# EAGLE board Sparkfun_MiP_ProMini-Pack-Panel-v10 (EAGLE 6.6.0), part 1 of 2
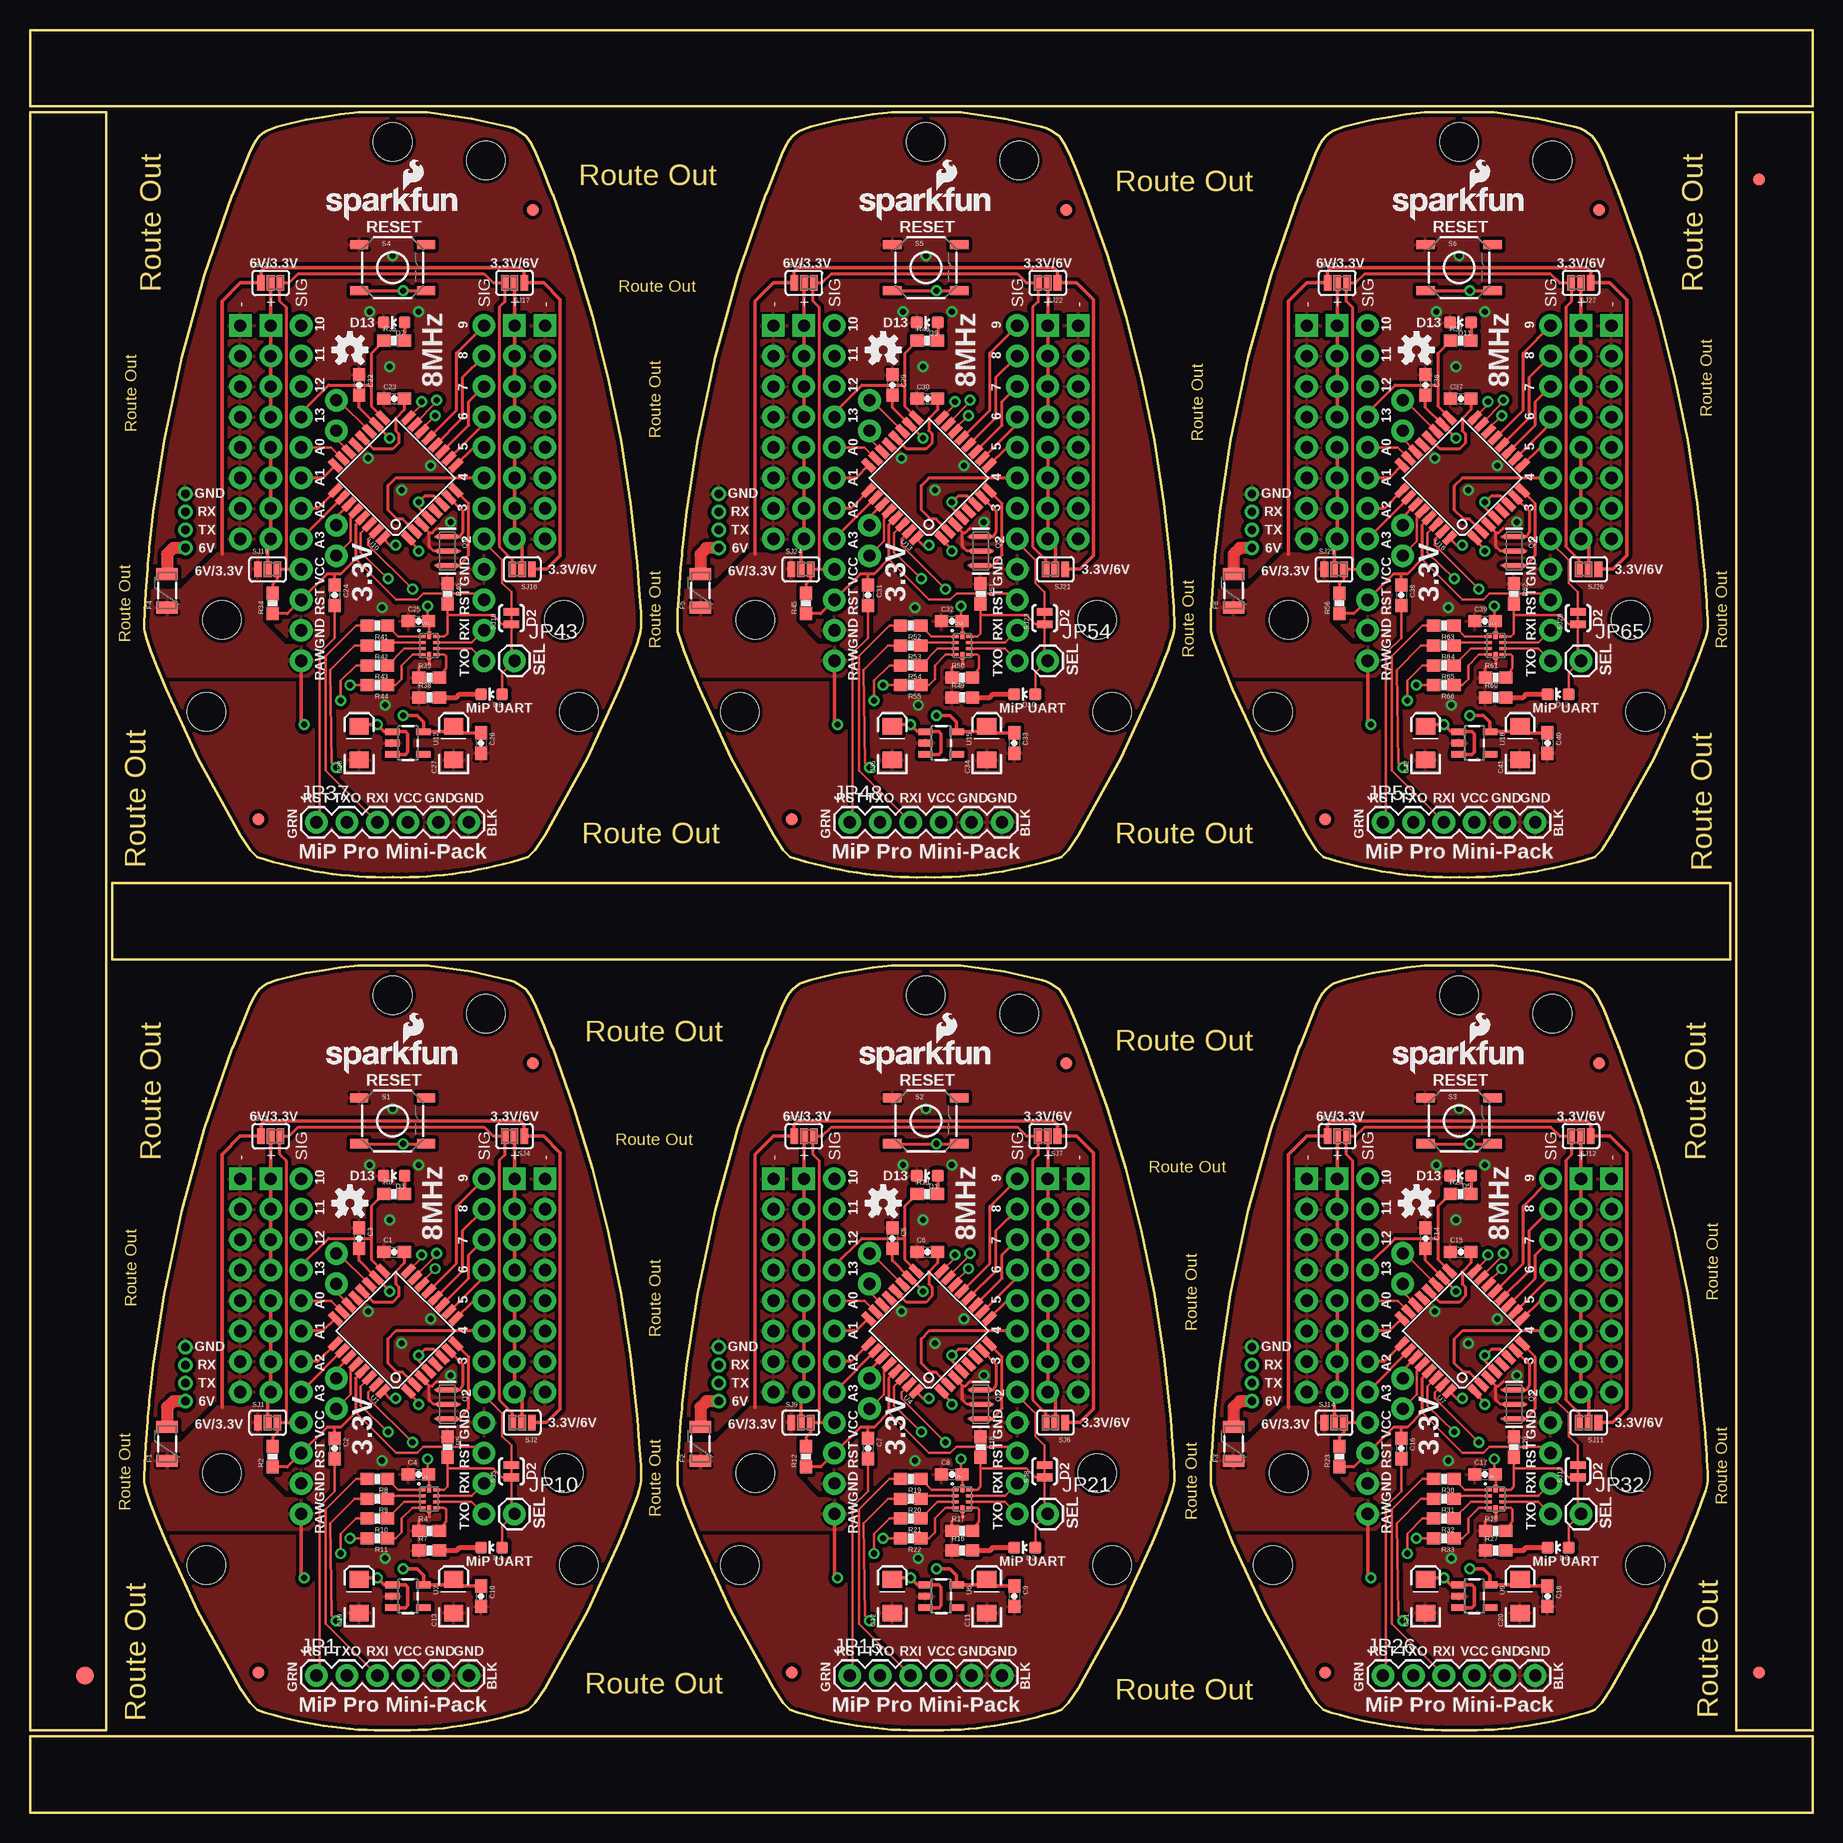
[diagram p0: board, top side]
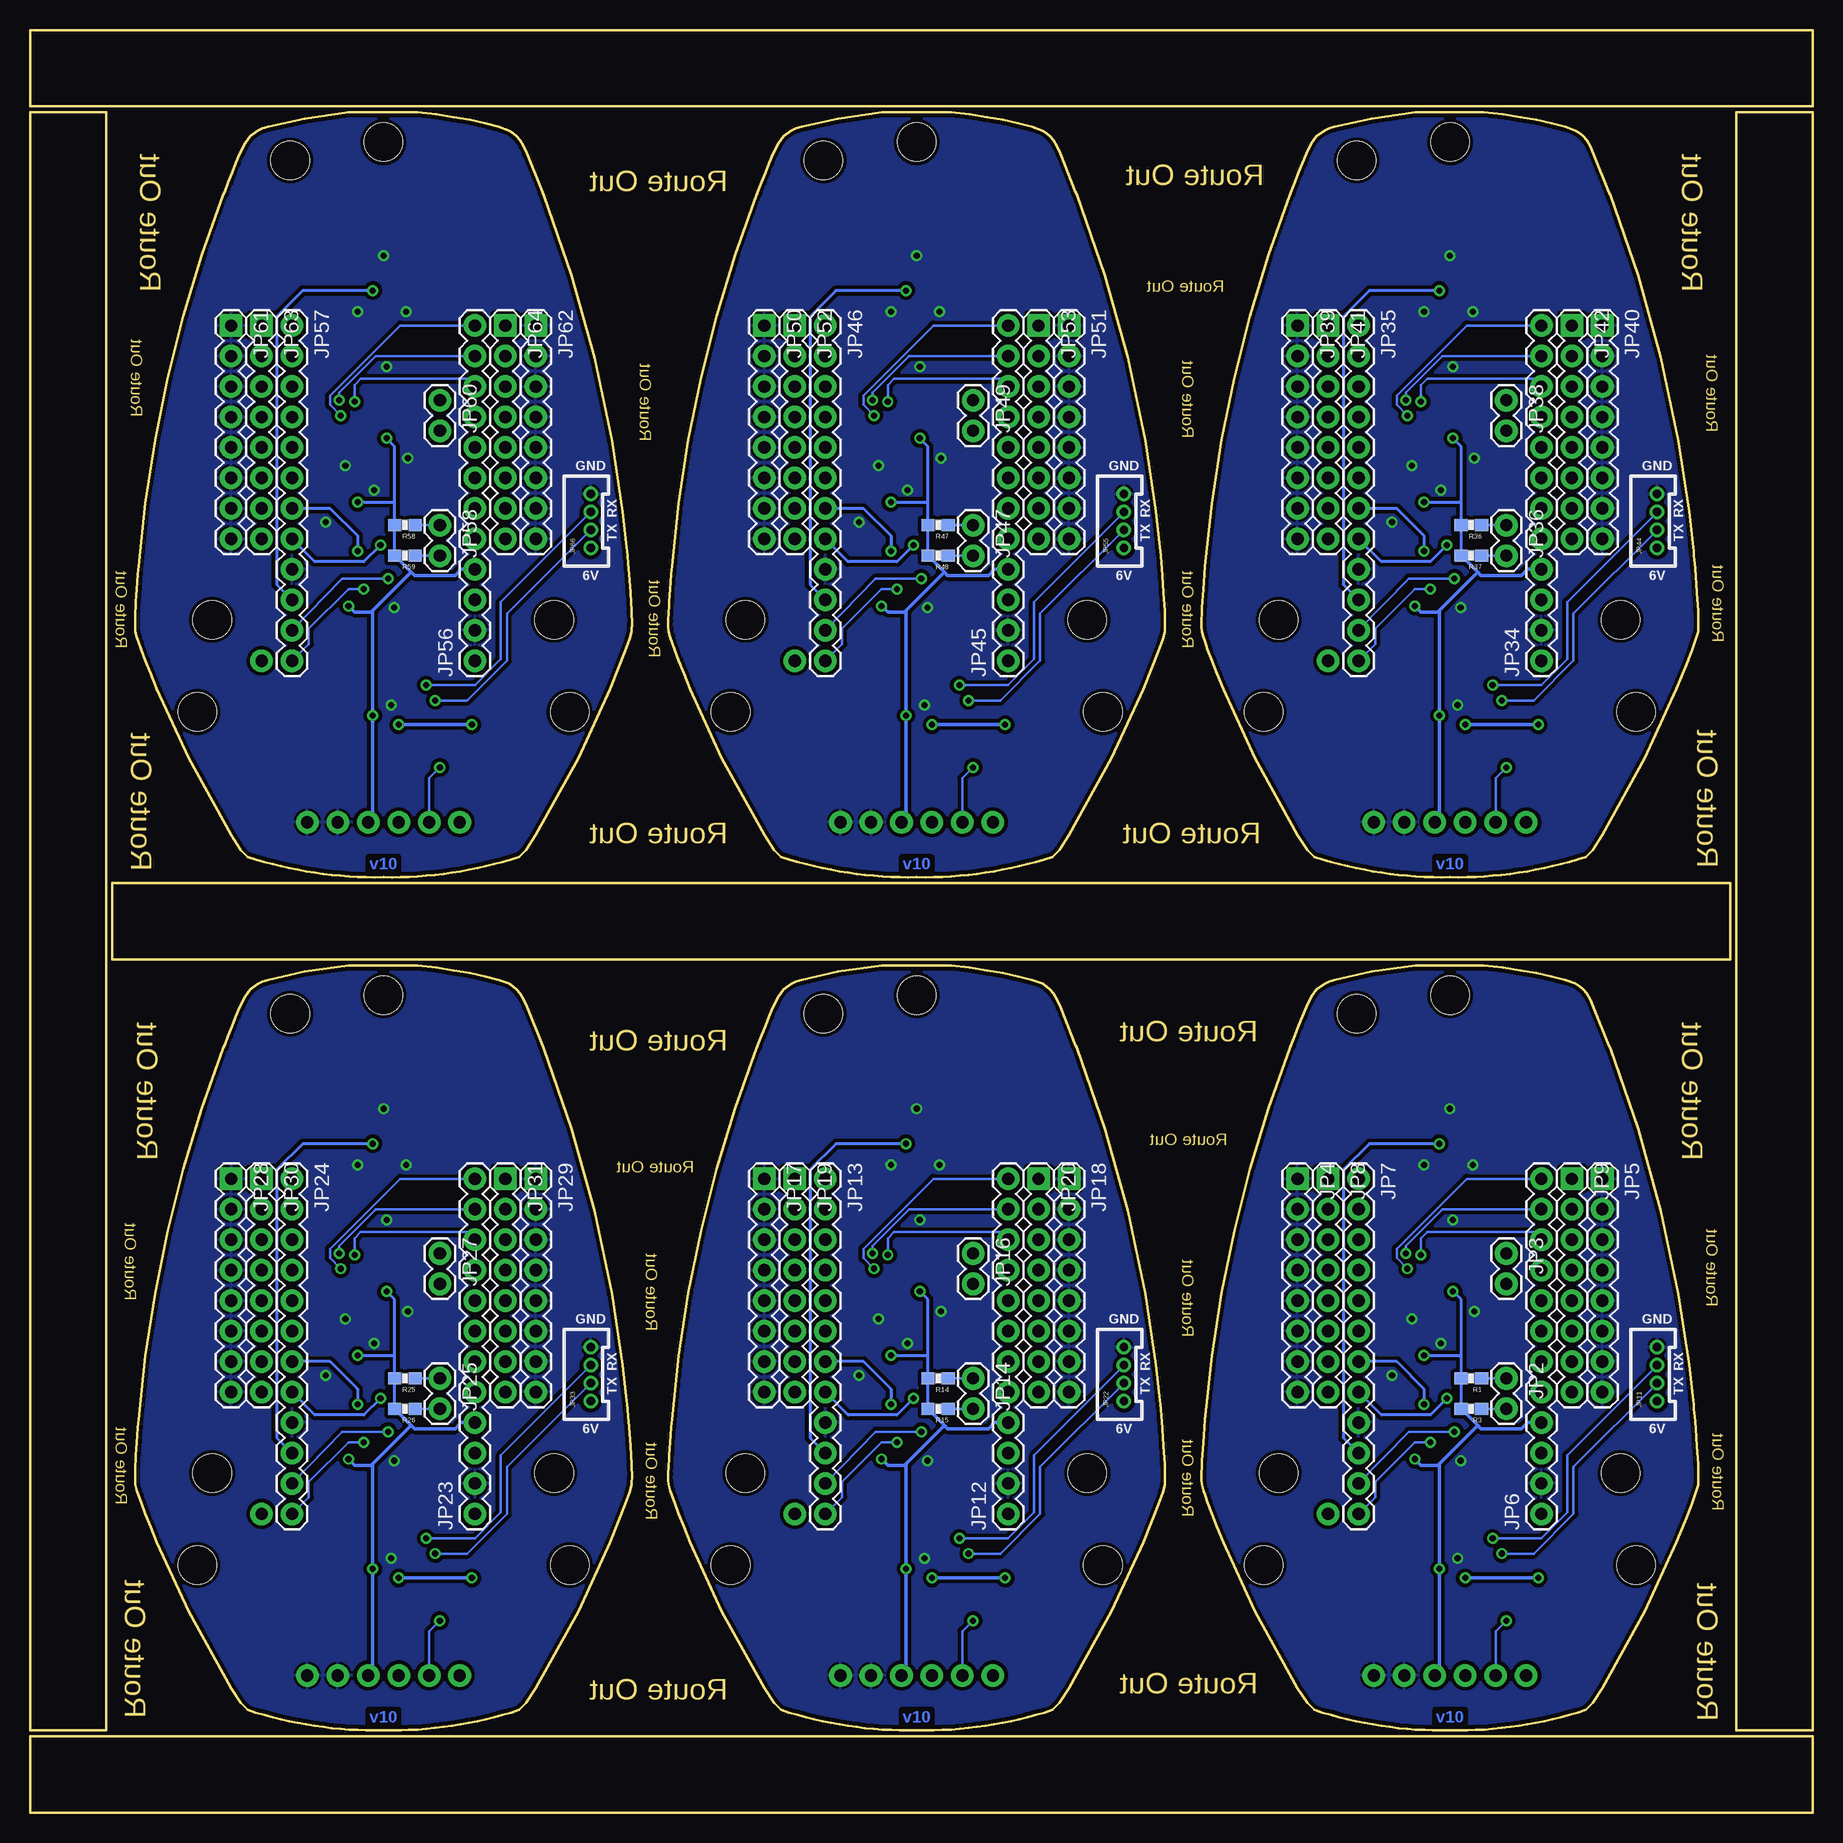
[diagram p1: board, bottom side, seen from below]

Size 148.59 x 148.59 mm. Coordinates in mm from the lower left corner, seen from the top.
Outline: 842 segments
Copper layers (1*16): Top 0.035mm / dielectric 1.5mm / Bottom 0.035mm
Design rules "default *": minimum track width 6mil, minimum drill 13mil, track to track 6mil, track to pad 6mil, pad to pad 6mil, via to via 6mil, smd to smd 6mil, copper to edge 8mil, drill to drill 8mil, minimum pad ring 10mil, minimum via ring 8mil, stop-mask expansion 4mil, vias tented up to drill 25mil, thermal gap 8mil
Net classes: 0 default: width 0.203 mm; 1 vcc: width 0.254 mm
Holes 3.2 mm at 30.23,68.12 38,66.6 44.5,28.3 14.71,20.62 45.75,20.62 16,28.3 74.68,68.12 82.45,66.6 88.95,28.3 59.16,20.62 90.2,20.62 60.45,28.3 119.13,68.12 126.9,66.6 133.4,28.3 103.61,20.62 134.65,20.62 104.9,28.3 30.23,139.24 38,137.72 44.5,99.42 14.71,91.74 45.75,91.74 16,99.42 74.68,139.24 82.45,137.72 88.95,99.42 59.16,91.74 90.2,91.74 60.45,99.42 119.13,139.24 126.9,137.72 133.4,99.42 103.61,91.74 134.65,91.74 104.9,99.42

## Footprints (pad centres in the part's own frame; a part is rotated, then mirrored left to right if it is on the bottom)
0603-CAP = smd 1.1 x 1: 1 -0.85,0; 2 0.85,0
EIA3216 = smd 1.4 x 1.6: A 1.4,0; C -1.4,0
LED-0603 = smd 1 x 1: A 0,-0.877; C 0,0.877
FIDUCIAL-1.5X3 = smd 1.5 x 1.5: 1 0,0
FIDUCIAL-1X2 = smd 1 x 1: 1 0,0
PTC-1206 = smd 1 x 1.8: 1 -1.4,0; 2 1.4,0
1X06 = drill 1.016 pad 1.88: 1 0,0; 2 2.54,0; 3 5.08,0; 4 7.62,0; 5 10.16,0; 6 12.7,0
1X02 = drill 1.016 pad 1.88: 1 0,0; 2 2.54,0
1X08 = drill 1.016 pad 1.88 square: 1 0,0 | drill 1.016 pad 1.88: 2 2.54,0; 3 5.08,0; 4 7.62,0; 5 10.16,0; 6 12.7,0; 7 15.24,0; 8 17.78,0
1X12 = drill 1.016 pad 1.88: 1 0,0; 2 2.54,0; 3 5.08,0; 4 7.62,0; 5 10.16,0; 6 12.7,0; 7 15.24,0; 8 17.78,0; 9 20.32,0; 10 22.86,0; 11 25.4,0; 12 27.94,0
1X01 = drill 1.016 pad 1.88: 1 0,0
1X04-1.5MM_JST = drill 0.7: 1 0,0; 2 1.5,0; 3 3,0; 4 4.5,0
RESONATOR-SMD = smd 0.45 x 1.905: 1 -1.2,0; 2 0,0; 3 1.2,0
0603-RES = smd 1.1 x 1: 1 -0.85,0; 2 0.85,0
TACTILE-SWITCH-SMD = smd 1.524 x 0.762: 1 -2.794,1.905; 2 2.794,1.905; 3 -2.794,-1.905; 4 2.794,-1.905
PAD-JUMPER-3-2OF3_NC_BY_PASTE_YES_SILK_FULL_BOX = smd 0.635 x 1.27: 1 -0.813,0; 2 0,0; 3 0.813,0
PAD-JUMPER-2-NC_BY_TRACE_YES_SILK = smd 0.635 x 1.27: 1 -0.508,0; 2 0.508,0
TQFP32-08 = smd 1.27 x 0.559: 1 -4.293,2.8; 2 -4.293,2; 3 -4.293,1.2; 4 -4.293,0.4; 5 -4.293,-0.4; 6 -4.293,-1.2; 7 -4.293,-2; 8 -4.293,-2.8; 17 4.293,-2.8; 18 4.293,-2; 19 4.293,-1.2; 20 4.293,-0.4; 21 4.293,0.4; 22 4.293,1.2; 23 4.293,2; 24 4.293,2.8 | smd 0.559 x 1.27: 9 -2.8,-4.293; 10 -2,-4.293; 11 -1.2,-4.293; 12 -0.4,-4.293; 13 0.4,-4.293; 14 1.2,-4.293; 15 2,-4.293; 16 2.8,-4.293; 25 2.8,4.293; 26 2,4.293; 27 1.2,4.293; 28 0.4,4.293; 29 -0.4,4.293; 30 -1.2,4.293; 31 -2,4.293; 32 -2.8,4.293
SOT23-5 = smd 0.55 x 1.2: 1 -0.95,-1.3; 2 0,-1.3; 3 0.95,-1.3; 4 0.95,1.3; 5 -0.95,1.3
QFN-10-RSE = smd 0.58 x 0.25: 1 -0.6,0.75; 2 -0.6,0.25; 3 -0.6,-0.25; 4 -0.6,-0.75; 6 0.6,-0.75; 7 0.6,-0.25; 8 0.6,0.25; 9 0.6,0.75 | smd 0.35 x 0.63: 5 0,-0.85; 10 0,0.85

## Placement (x,y rotation side)
C1  0.1uF  [0603-CAP]  30.35,46.74 0 top
C2  0.1uF  [0603-CAP]  25.4,30.35 270 top
C3  0.1uF  [0603-CAP]  27.43,47.88 270 top
C4  0.1uF  [0603-CAP]  32.38,28.19 0 top
C5  0.1uF  [0603-CAP]  71.88,47.88 270 top
C6  0.1uF  [0603-CAP]  74.8,46.74 0 top
C7  0.1uF  [0603-CAP]  69.85,30.35 270 top
C8  0.1uF  [0603-CAP]  76.83,28.19 0 top
C9  0.1uF  [0603-CAP]  82.04,18.03 270 top
C10  0.1uF  [0603-CAP]  37.59,18.03 270 top
C11  10uF  [EIA3216]  79.76,18.03 90 top
C12  10uF  [EIA3216]  71.88,18.03 90 top
C13  10uF  [EIA3216]  35.31,18.03 90 top
C14  0.1uF  [0603-CAP]  116.33,47.88 270 top
C15  0.1uF  [0603-CAP]  119.25,46.74 0 top
C16  0.1uF  [0603-CAP]  114.3,30.35 270 top
C17  0.1uF  [0603-CAP]  121.28,28.19 0 top
C18  0.1uF  [0603-CAP]  126.49,18.03 270 top
C19  10uF  [EIA3216]  27.43,18.03 90 top
C20  10uF  [EIA3216]  124.21,18.03 90 top
C21  10uF  [EIA3216]  116.33,18.03 90 top
C22  0.1uF  [0603-CAP]  27.43,119 270 top
C23  0.1uF  [0603-CAP]  30.35,117.86 0 top
C24  0.1uF  [0603-CAP]  25.4,101.47 270 top
C25  0.1uF  [0603-CAP]  32.38,99.31 0 top
C26  0.1uF  [0603-CAP]  37.59,89.15 270 top
C27  10uF  [EIA3216]  35.31,89.15 90 top
C28  10uF  [EIA3216]  27.43,89.15 90 top
C29  0.1uF  [0603-CAP]  71.88,119 270 top
C30  0.1uF  [0603-CAP]  74.8,117.86 0 top
C31  0.1uF  [0603-CAP]  69.85,101.47 270 top
C32  0.1uF  [0603-CAP]  76.83,99.31 0 top
C33  0.1uF  [0603-CAP]  82.04,89.15 270 top
C34  10uF  [EIA3216]  79.76,89.15 90 top
C35  10uF  [EIA3216]  71.88,89.15 90 top
C36  0.1uF  [0603-CAP]  116.33,119 270 top
C37  0.1uF  [0603-CAP]  119.25,117.86 0 top
C38  0.1uF  [0603-CAP]  114.3,101.47 270 top
C39  0.1uF  [0603-CAP]  121.28,99.31 0 top
C40  0.1uF  [0603-CAP]  126.49,89.15 270 top
C41  10uF  [EIA3216]  124.21,89.15 90 top
C42  10uF  [EIA3216]  116.33,89.15 90 top
D1  Green  [LED-0603]  74.8,53.09 90 top
D2  GREEN  [LED-0603]  82.93,22.1 90 top
D3  Green  [LED-0603]  30.35,53.09 90 top
D4  GREEN  [LED-0603]  38.48,22.1 90 top
D5  Green  [LED-0603]  119.25,53.09 90 top
D6  GREEN  [LED-0603]  127.38,22.1 90 top
D7  Green  [LED-0603]  30.35,124.21 90 top
D8  GREEN  [LED-0603]  38.48,93.22 90 top
D9  Green  [LED-0603]  74.8,124.21 90 top
D10  GREEN  [LED-0603]  82.93,93.22 90 top
D11  Green  [LED-0603]  119.25,124.21 90 top
D12  GREEN  [LED-0603]  127.38,93.22 90 top
E$1  [FIDUCIAL-1.5X3]  4.57,11.43 0 top
E$4  [FIDUCIAL-1X2]  144.15,11.68 0 top
E$10  [FIDUCIAL-1X2]  144.15,136.14 180 top
F1  PTCSMD  [PTC-1206]  11.43,30.73 90 top
F2  PTCSMD  [PTC-1206]  55.88,30.73 90 top
F3  PTCSMD  [PTC-1206]  100.33,30.73 90 top
F4  PTCSMD  [PTC-1206]  11.43,101.85 90 top
F5  PTCSMD  [PTC-1206]  55.88,101.85 90 top
F6  PTCSMD  [PTC-1206]  100.33,101.85 90 top
FID1  FIDUCIAL1X2  [FIDUCIAL-1X2]  19.05,11.68 0 top
FID2  FIDUCIAL1X2  [FIDUCIAL-1X2]  41.91,62.48 0 top
FID3  FIDUCIAL1X2  [FIDUCIAL-1X2]  63.5,11.68 0 top
FID4  FIDUCIAL1X2  [FIDUCIAL-1X2]  86.36,62.48 0 top
FID5  FIDUCIAL1X2  [FIDUCIAL-1X2]  107.95,11.68 0 top
FID6  FIDUCIAL1X2  [FIDUCIAL-1X2]  130.81,62.48 0 top
FID7  FIDUCIAL1X2  [FIDUCIAL-1X2]  19.05,82.8 0 top
FID8  FIDUCIAL1X2  [FIDUCIAL-1X2]  41.91,133.6 0 top
FID9  FIDUCIAL1X2  [FIDUCIAL-1X2]  63.5,82.8 0 top
FID10  FIDUCIAL1X2  [FIDUCIAL-1X2]  86.36,133.6 0 top
FID11  FIDUCIAL1X2  [FIDUCIAL-1X2]  107.95,82.8 0 top
FID12  FIDUCIAL1X2  [FIDUCIAL-1X2]  130.81,133.6 0 top
JP1  FTDI Basic  [1X06]  23.88,11.43 0 top
JP2  [1X02]  25.53,36.2 270 bottom
JP3  [1X02]  25.53,46.61 270 bottom
JP4  [1X08]  42.93,52.83 270 bottom
JP5  [1X08]  17.53,52.83 270 bottom
JP6  [1X12]  22.61,24.89 90 bottom
JP7  [1X12]  37.85,52.83 270 bottom
JP8  [1X08]  40.39,52.83 270 bottom
JP9  [1X08]  20.07,52.83 270 bottom
JP10  M01PTH  [1X01]  40.39,24.89 0 top
JP11  [1X04-1.5MM_JST]  12.95,34.29 90 bottom
JP12  [1X12]  67.06,24.89 90 bottom
JP13  [1X12]  82.3,52.83 270 bottom
JP14  [1X02]  69.98,36.2 270 bottom
JP15  FTDI Basic  [1X06]  68.33,11.43 0 top
JP16  [1X02]  69.98,46.61 270 bottom
JP17  [1X08]  87.38,52.83 270 bottom
JP18  [1X08]  61.98,52.83 270 bottom
JP19  [1X08]  84.84,52.83 270 bottom
JP20  [1X08]  64.52,52.83 270 bottom
JP21  M01PTH  [1X01]  84.84,24.89 0 top
JP22  [1X04-1.5MM_JST]  57.4,34.29 90 bottom
JP23  [1X12]  111.51,24.89 90 bottom
JP24  [1X12]  126.75,52.83 270 bottom
JP25  [1X02]  114.43,36.2 270 bottom
JP26  FTDI Basic  [1X06]  112.78,11.43 0 top
JP27  [1X02]  114.43,46.61 270 bottom
JP28  [1X08]  131.83,52.83 270 bottom
JP29  [1X08]  106.43,52.83 270 bottom
JP30  [1X08]  129.29,52.83 270 bottom
JP31  [1X08]  108.97,52.83 270 bottom
JP32  M01PTH  [1X01]  129.29,24.89 0 top
JP33  [1X04-1.5MM_JST]  101.85,34.29 90 bottom
JP34  [1X12]  22.61,96.01 90 bottom
JP35  [1X12]  37.85,123.95 270 bottom
JP36  [1X02]  25.53,107.31 270 bottom
JP37  FTDI Basic  [1X06]  23.88,82.55 0 top
JP38  [1X02]  25.53,117.73 270 bottom
JP39  [1X08]  42.93,123.95 270 bottom
JP40  [1X08]  17.53,123.95 270 bottom
JP41  [1X08]  40.39,123.95 270 bottom
JP42  [1X08]  20.07,123.95 270 bottom
JP43  M01PTH  [1X01]  40.39,96.01 0 top
JP44  [1X04-1.5MM_JST]  12.95,105.41 90 bottom
JP45  [1X12]  67.06,96.01 90 bottom
JP46  [1X12]  82.3,123.95 270 bottom
JP47  [1X02]  69.98,107.31 270 bottom
JP48  FTDI Basic  [1X06]  68.33,82.55 0 top
JP49  [1X02]  69.98,117.73 270 bottom
JP50  [1X08]  87.38,123.95 270 bottom
JP51  [1X08]  61.98,123.95 270 bottom
JP52  [1X08]  84.84,123.95 270 bottom
JP53  [1X08]  64.52,123.95 270 bottom
JP54  M01PTH  [1X01]  84.84,96.01 0 top
JP55  [1X04-1.5MM_JST]  57.4,105.41 90 bottom
JP56  [1X12]  111.51,96.01 90 bottom
JP57  [1X12]  126.75,123.95 270 bottom
JP58  [1X02]  114.43,107.31 270 bottom
JP59  FTDI Basic  [1X06]  112.78,82.55 0 top
JP60  [1X02]  114.43,117.73 270 bottom
JP61  [1X08]  131.83,123.95 270 bottom
JP62  [1X08]  106.43,123.95 270 bottom
JP63  [1X08]  129.29,123.95 270 bottom
JP64  [1X08]  108.97,123.95 270 bottom
JP65  M01PTH  [1X01]  129.29,96.01 0 top
JP66  [1X04-1.5MM_JST]  101.85,105.41 90 bottom
LOGO1  SFE_LOGO_NAME_FLAME.1_INCH  [SFE_LOGO_NAME_FLAME_.1]  24.26,61.47 0 top
LOGO2  OSHW-LOGOS  [OSHW-LOGO-S]  26.67,50.8 0 top
LOGO3  SFE_LOGO_NAME_FLAME.1_INCH  [SFE_LOGO_NAME_FLAME_.1]  68.71,61.47 0 top
LOGO4  OSHW-LOGOS  [OSHW-LOGO-S]  71.12,50.8 0 top
LOGO5  SFE_LOGO_NAME_FLAME.1_INCH  [SFE_LOGO_NAME_FLAME_.1]  113.16,61.47 0 top
LOGO6  OSHW-LOGOS  [OSHW-LOGO-S]  115.57,50.8 0 top
LOGO7  SFE_LOGO_NAME_FLAME.1_INCH  [SFE_LOGO_NAME_FLAME_.1]  24.26,132.59 0 top
LOGO8  OSHW-LOGOS  [OSHW-LOGO-S]  26.67,121.92 0 top
LOGO9  SFE_LOGO_NAME_FLAME.1_INCH  [SFE_LOGO_NAME_FLAME_.1]  68.71,132.59 0 top
LOGO10  OSHW-LOGOS  [OSHW-LOGO-S]  71.12,121.92 0 top
LOGO11  SFE_LOGO_NAME_FLAME.1_INCH  [SFE_LOGO_NAME_FLAME_.1]  113.16,132.59 0 top
LOGO12  OSHW-LOGOS  [OSHW-LOGO-S]  115.57,121.92 0 top
Q1  8MHz  [RESONATOR-SMD]  34.8,34.04 270 top
Q2  8MHz  [RESONATOR-SMD]  79.25,34.04 270 top
Q3  8MHz  [RESONATOR-SMD]  123.7,34.04 270 top
Q4  8MHz  [RESONATOR-SMD]  34.8,105.16 270 top
Q5  8MHz  [RESONATOR-SMD]  79.25,105.16 270 top
Q6  8MHz  [RESONATOR-SMD]  123.7,105.16 270 top
R1  DNP  [0603-RES]  28.45,36.2 180 bottom
R2  10K  [0603-RES]  20.24,29.67 90 top
R3  DNP  [0603-RES]  28.45,33.66 180 bottom
R4  10K  [0603-RES]  33.27,23.5 0 top
R5  10K  [0603-RES]  34.8,30.48 270 top
R6  330  [0603-RES]  30.35,51.56 0 top
R7  1K  [0603-RES]  33.27,21.84 0 top
R8  1K  [0603-RES]  28.96,27.81 180 top
R9  1K  [0603-RES]  28.96,26.16 180 top
R10  1K  [0603-RES]  28.96,24.51 180 top
R11  1K  [0603-RES]  28.96,22.86 180 top
R12  10K  [0603-RES]  64.69,29.67 90 top
R13  330  [0603-RES]  74.8,51.56 0 top
R14  DNP  [0603-RES]  72.9,36.2 180 bottom
R15  DNP  [0603-RES]  72.9,33.66 180 bottom
R16  1K  [0603-RES]  77.72,21.84 0 top
R17  10K  [0603-RES]  77.72,23.5 0 top
R18  10K  [0603-RES]  79.25,30.48 270 top
R19  1K  [0603-RES]  73.41,27.81 180 top
R20  1K  [0603-RES]  73.41,26.16 180 top
R21  1K  [0603-RES]  73.41,24.51 180 top
R22  1K  [0603-RES]  73.41,22.86 180 top
R23  10K  [0603-RES]  109.14,29.67 90 top
R24  330  [0603-RES]  119.25,51.56 0 top
R25  DNP  [0603-RES]  117.35,36.2 180 bottom
R26  DNP  [0603-RES]  117.35,33.66 180 bottom
R27  1K  [0603-RES]  122.17,21.84 0 top
R28  10K  [0603-RES]  122.17,23.5 0 top
R29  10K  [0603-RES]  123.7,30.48 270 top
R30  1K  [0603-RES]  117.86,27.81 180 top
R31  1K  [0603-RES]  117.86,26.16 180 top
R32  1K  [0603-RES]  117.86,24.51 180 top
R33  1K  [0603-RES]  117.86,22.86 180 top
R34  10K  [0603-RES]  20.24,100.79 90 top
R35  330  [0603-RES]  30.35,122.68 0 top
R36  DNP  [0603-RES]  28.45,107.31 180 bottom
R37  DNP  [0603-RES]  28.45,104.78 180 bottom
R38  1K  [0603-RES]  33.27,92.96 0 top
R39  10K  [0603-RES]  33.27,94.61 0 top
R40  10K  [0603-RES]  34.8,101.6 270 top
R41  1K  [0603-RES]  28.96,98.93 180 top
R42  1K  [0603-RES]  28.96,97.28 180 top
R43  1K  [0603-RES]  28.96,95.63 180 top
R44  1K  [0603-RES]  28.96,93.98 180 top
R45  10K  [0603-RES]  64.69,100.79 90 top
R46  330  [0603-RES]  74.8,122.68 0 top
R47  DNP  [0603-RES]  72.9,107.31 180 bottom
R48  DNP  [0603-RES]  72.9,104.78 180 bottom
R49  1K  [0603-RES]  77.72,92.96 0 top
R50  10K  [0603-RES]  77.72,94.61 0 top
R51  10K  [0603-RES]  79.25,101.6 270 top
R52  1K  [0603-RES]  73.41,98.93 180 top
R53  1K  [0603-RES]  73.41,97.28 180 top
R54  1K  [0603-RES]  73.41,95.63 180 top
R55  1K  [0603-RES]  73.41,93.98 180 top
R56  10K  [0603-RES]  109.14,100.79 90 top
R57  330  [0603-RES]  119.25,122.68 0 top
R58  DNP  [0603-RES]  117.35,107.31 180 bottom
R59  DNP  [0603-RES]  117.35,104.78 180 bottom
R60  1K  [0603-RES]  122.17,92.96 0 top
R61  10K  [0603-RES]  122.17,94.61 0 top
R62  10K  [0603-RES]  123.7,101.6 270 top
R63  1K  [0603-RES]  117.86,98.93 180 top
R64  1K  [0603-RES]  117.86,97.28 180 top
R65  1K  [0603-RES]  117.86,95.63 180 top
R66  1K  [0603-RES]  117.86,93.98 180 top
S1  Reset  [TACTILE-SWITCH-SMD]  30.23,57.66 0 top
S2  Reset  [TACTILE-SWITCH-SMD]  74.68,57.66 0 top
S3  Reset  [TACTILE-SWITCH-SMD]  119.13,57.66 0 top
S4  Reset  [TACTILE-SWITCH-SMD]  30.23,128.78 0 top
S5  Reset  [TACTILE-SWITCH-SMD]  74.68,128.78 0 top
S6  Reset  [TACTILE-SWITCH-SMD]  119.13,128.78 0 top
SJ1  [PAD-JUMPER-3-2OF3_NC_BY_PASTE_YES_SILK_FULL_BOX]  19.81,32.51 0 top
SJ2  [PAD-JUMPER-3-2OF3_NC_BY_PASTE_YES_SILK_FULL_BOX]  41.02,32.51 180 top
SJ3  [PAD-JUMPER-3-2OF3_NC_BY_PASTE_YES_SILK_FULL_BOX]  20.07,56.39 0 top
SJ4  [PAD-JUMPER-3-2OF3_NC_BY_PASTE_YES_SILK_FULL_BOX]  40.39,56.39 180 top
SJ5  D2 Jumper  [PAD-JUMPER-2-NC_BY_TRACE_YES_SILK]  40.13,28.45 90 top
SJ6  [PAD-JUMPER-3-2OF3_NC_BY_PASTE_YES_SILK_FULL_BOX]  85.47,32.51 180 top
SJ7  [PAD-JUMPER-3-2OF3_NC_BY_PASTE_YES_SILK_FULL_BOX]  84.84,56.39 180 top
SJ8  D2 Jumper  [PAD-JUMPER-2-NC_BY_TRACE_YES_SILK]  84.58,28.45 90 top
SJ9  [PAD-JUMPER-3-2OF3_NC_BY_PASTE_YES_SILK_FULL_BOX]  64.26,32.51 0 top
SJ10  [PAD-JUMPER-3-2OF3_NC_BY_PASTE_YES_SILK_FULL_BOX]  64.52,56.39 0 top
SJ11  [PAD-JUMPER-3-2OF3_NC_BY_PASTE_YES_SILK_FULL_BOX]  129.92,32.51 180 top
SJ12  [PAD-JUMPER-3-2OF3_NC_BY_PASTE_YES_SILK_FULL_BOX]  129.29,56.39 180 top
SJ13  D2 Jumper  [PAD-JUMPER-2-NC_BY_TRACE_YES_SILK]  129.03,28.45 90 top
SJ14  [PAD-JUMPER-3-2OF3_NC_BY_PASTE_YES_SILK_FULL_BOX]  108.71,32.51 0 top
SJ15  [PAD-JUMPER-3-2OF3_NC_BY_PASTE_YES_SILK_FULL_BOX]  108.97,56.39 0 top
SJ16  [PAD-JUMPER-3-2OF3_NC_BY_PASTE_YES_SILK_FULL_BOX]  41.02,103.63 180 top
SJ17  [PAD-JUMPER-3-2OF3_NC_BY_PASTE_YES_SILK_FULL_BOX]  40.39,127.51 180 top
SJ18  D2 Jumper  [PAD-JUMPER-2-NC_BY_TRACE_YES_SILK]  40.13,99.57 90 top
SJ19  [PAD-JUMPER-3-2OF3_NC_BY_PASTE_YES_SILK_FULL_BOX]  19.81,103.63 0 top
SJ20  [PAD-JUMPER-3-2OF3_NC_BY_PASTE_YES_SILK_FULL_BOX]  20.07,127.51 0 top
SJ21  [PAD-JUMPER-3-2OF3_NC_BY_PASTE_YES_SILK_FULL_BOX]  85.47,103.63 180 top
SJ22  [PAD-JUMPER-3-2OF3_NC_BY_PASTE_YES_SILK_FULL_BOX]  84.84,127.51 180 top
SJ23  D2 Jumper  [PAD-JUMPER-2-NC_BY_TRACE_YES_SILK]  84.58,99.57 90 top
SJ24  [PAD-JUMPER-3-2OF3_NC_BY_PASTE_YES_SILK_FULL_BOX]  64.26,103.63 0 top
SJ25  [PAD-JUMPER-3-2OF3_NC_BY_PASTE_YES_SILK_FULL_BOX]  64.52,127.51 0 top
SJ26  [PAD-JUMPER-3-2OF3_NC_BY_PASTE_YES_SILK_FULL_BOX]  129.92,103.63 180 top
SJ27  [PAD-JUMPER-3-2OF3_NC_BY_PASTE_YES_SILK_FULL_BOX]  129.29,127.51 180 top
SJ28  D2 Jumper  [PAD-JUMPER-2-NC_BY_TRACE_YES_SILK]  129.03,99.57 90 top
SJ29  [PAD-JUMPER-3-2OF3_NC_BY_PASTE_YES_SILK_FULL_BOX]  108.71,103.63 0 top
SJ30  [PAD-JUMPER-3-2OF3_NC_BY_PASTE_YES_SILK_FULL_BOX]  108.97,127.51 0 top
U1  ATMEGA328  [TQFP32-08]  30.48,40.13 135 top
U2  MIC5205  [SOT23-5]  31.5,18.03 270 top
U3  TS3USB221A  [QFN-10-RSE]  33.27,26.16 0 top
U4  ATMEGA328  [TQFP32-08]  74.93,40.13 135 top
U5  TS3USB221A  [QFN-10-RSE]  77.72,26.16 0 top
U6  MIC5205  [SOT23-5]  75.95,18.03 270 top
U7  ATMEGA328  [TQFP32-08]  119.38,40.13 135 top
U8  TS3USB221A  [QFN-10-RSE]  122.17,26.16 0 top
U9  MIC5205  [SOT23-5]  120.4,18.03 270 top
U10  ATMEGA328  [TQFP32-08]  30.48,111.25 135 top
U11  TS3USB221A  [QFN-10-RSE]  33.27,97.28 0 top
U12  MIC5205  [SOT23-5]  31.5,89.15 270 top
U13  ATMEGA328  [TQFP32-08]  74.93,111.25 135 top
U14  TS3USB221A  [QFN-10-RSE]  77.72,97.28 0 top
U15  MIC5205  [SOT23-5]  75.95,89.15 270 top
U16  ATMEGA328  [TQFP32-08]  119.38,111.25 135 top
U17  TS3USB221A  [QFN-10-RSE]  122.17,97.28 0 top
U18  MIC5205  [SOT23-5]  120.4,89.15 270 top

## Library data of the parts
C1-C10 C14-C18 C22-C26 C29-C33 C36-C40 = SparkFun-Capacitors; PROD_ID: CAP-00810
C11-C13 C19-C21 C27 C28 C34 C35 C41 C42 JP1-JP3 JP6 JP7 JP12-JP16 JP23-JP27 JP34-JP38 JP45-JP49 JP56-JP60 R1-R3 R12 R14 R15 R23 R25 R26 R34 R36 R37 R45 R47 R48 R56 R58 R59 = SparkFun
D1-D12 = SparkFun-LED; PROD_ID: DIO-00821
E$1 = SparkFun-Retired
E$4 E$10 FID1-FID12 LOGO1-LOGO12 = SparkFun-Aesthetics
F1-F6 = SparkFun-PowerIC; PROD_ID: RES-11150
JP4 JP5 JP8-JP11 JP17-JP22 JP28-JP33 JP39-JP44 JP50-JP55 JP61-JP66 = SparkFun-Connectors
Q1-Q6 = SparkFun-FreqCtrl; PROD_ID: XTAL-08895
R4 R5 R17 R18 R28 R29 R39 R40 R50 R51 R61 R62 = SparkFun-Resistors; PROD_ID: RES-00824
R6 R13 R24 R35 R46 R57 = SparkFun-Resistors; PROD_ID: RES-00818
R7-R11 R16 R19-R22 R27 R30-R33 R38 R41-R44 R49 R52-R55 R60 R63-R66 = SparkFun-Resistors; PROD_ID: RES-07856
S1-S6 = SparkFun-Electromechanical; PROD_ID: SWCH-08247
SJ1-SJ30 = SparkFun-Passives
U1 U4 U7 U10 U13 U16 = SparkFun-DigitalIC; PROD_ID: IC-09069
U2 U6 U9 U12 U15 U18 = SparkFun-PowerIC; PROD_ID: VREG-00822
U3 U5 U8 U11 U14 U17 = SparkFun-AnalogIC; PROD_ID: IC-12115

## Nets
A0: JP6.8 U1.23
A1: JP6.7 U1.24
A2: JP6.6 U1.25
A3: JP6.5 U1.26
A4: JP2.1 R1.1 U1.27
A5: JP2.2 R3.1 U1.28
A6: JP3.1 U1.19
A7: JP3.2 U1.22
A8: JP14.2 R15.1 U4.28
A9: JP14.1 R14.1 U4.27
A10: JP12.5 U4.26
A11: JP12.6 U4.25
A12: JP12.7 U4.24
A13: JP12.8 U4.23
A14: JP16.1 U4.19
A15: JP16.2 U4.22
A16: JP25.2 R26.1 U7.28
A17: JP25.1 R25.1 U7.27
A18: JP23.5 U7.26
A19: JP23.6 U7.25
A20: JP23.7 U7.24
A21: JP23.8 U7.23
A22: JP27.1 U7.19
A23: JP27.2 U7.22
A24: JP36.2 R37.1 U10.28
A25: JP36.1 R36.1 U10.27
A26: JP34.5 U10.26
A27: JP34.6 U10.25
A28: JP34.7 U10.24
A29: JP34.8 U10.23
A30: JP38.1 U10.19
A31: JP38.2 U10.22
A32: JP47.2 R48.1 U13.28
A33: JP47.1 R47.1 U13.27
A34: JP45.5 U13.26
A35: JP45.6 U13.25
A36: JP45.7 U13.24
A37: JP45.8 U13.23
A38: JP49.1 U13.19
A39: JP49.2 U13.22
A40: JP58.2 R59.1 U16.28
A41: JP58.1 R58.1 U16.27
A42: JP56.5 U16.26
A43: JP56.6 U16.25
A44: JP56.7 U16.24
A45: JP56.8 U16.23
A46: JP60.1 U16.19
A47: JP60.2 U16.22
AREF: C1.2 U1.20
AREF1: C6.2 U4.20
AREF2: C15.2 U7.20
AREF3: C23.2 U10.20
AREF4: C30.2 U13.20
AREF5: C37.2 U16.20
D1: JP13.1 U4.13
D2: JP7.8 SJ5.2 U1.32
D3: JP7.7 U1.1
D4: JP7.6 U1.2
D5: JP7.5 U1.9
D6: JP7.4 U1.10
D7: JP7.3 U1.11
D8: JP7.2 U1.12
D9: JP7.1 U1.13
D10: JP6.12 U1.14
D11: JP13.2 U4.12
D12: JP13.8 SJ8.2 U4.32
D13: JP13.7 U4.1
D14: JP13.6 U4.2
D15: JP13.5 U4.9
D16: JP13.4 U4.10
D17: JP13.3 U4.11
D18: JP12.12 U4.14
D19: JP24.1 U7.13
D20: JP24.2 U7.12
D21: JP24.8 SJ13.2 U7.32
D22: JP24.7 U7.1
D23: JP24.6 U7.2
D24: JP24.5 U7.9
D25: JP24.4 U7.10
D26: JP24.3 U7.11
D27: JP23.12 U7.14
D28: JP35.1 U10.13
D29: JP35.2 U10.12
D30: JP35.8 SJ18.2 U10.32
D31: JP35.7 U10.1
D32: JP35.6 U10.2
D33: JP35.5 U10.9
D34: JP35.4 U10.10
D35: JP35.3 U10.11
D36: JP34.12 U10.14
D37: JP46.1 U13.13
D38: JP46.2 U13.12
D39: JP46.8 SJ23.2 U13.32
D40: JP46.7 U13.1
D41: JP46.6 U13.2
D42: JP46.5 U13.9
D43: JP46.4 U13.10
D44: JP46.3 U13.11
D45: JP45.12 U13.14
D46: JP57.1 U16.13
D47: JP57.2 U16.12
D48: JP57.8 SJ28.2 U16.32
D49: JP57.7 U16.1
D50: JP57.6 U16.2
D51: JP57.5 U16.9
D52: JP57.4 U16.10
D53: JP57.3 U16.11
D54: JP56.12 U16.14
DTR: C2.2 JP1.1
DTR1: C7.2 JP15.1
DTR2: C16.2 JP26.1
DTR3: C24.2 JP37.1
DTR4: C31.2 JP48.1
DTR5: C38.2 JP59.1
GND: C1.1 C3.1 C4.1 C10.2 C13.C C19.C D3.C JP1.5 JP1.6 JP4.1 JP4.2 JP4.3 JP4.4 JP4.5 JP4.6 JP4.7 JP4.8 JP5.1 JP5.2 JP5.3 JP5.4 JP5.5 JP5.6 JP5.7 JP5.8 JP6.2 JP7.9 JP11.4 Q1.2 R4.1 R5.1 R7.1 S1.1 U1.3 U1.5 U1.21 U2.2 U3.5
GND1: C5.1 C6.1 C8.1 C9.2 C11.C C12.C D1.C JP12.2 JP13.9 JP15.5 JP15.6 JP17.1 JP17.2 JP17.3 JP17.4 JP17.5 JP17.6 JP17.7 JP17.8 JP18.1 JP18.2 JP18.3 JP18.4 JP18.5 JP18.6 JP18.7 JP18.8 JP22.4 Q2.2 R16.1 R17.1 R18.1 S2.1 U4.3 U4.5 U4.21 U5.5 U6.2
GND2: C14.1 C15.1 C17.1 C18.2 C20.C C21.C D5.C JP23.2 JP24.9 JP26.5 JP26.6 JP28.1 JP28.2 JP28.3 JP28.4 JP28.5 JP28.6 JP28.7 JP28.8 JP29.1 JP29.2 JP29.3 JP29.4 JP29.5 JP29.6 JP29.7 JP29.8 JP33.4 Q3.2 R27.1 R28.1 R29.1 S3.1 U7.3 U7.5 U7.21 U8.5 U9.2
GND3: C22.1 C23.1 C25.1 C26.2 C27.C C28.C D7.C JP34.2 JP35.9 JP37.5 JP37.6 JP39.1 JP39.2 JP39.3 JP39.4 JP39.5 JP39.6 JP39.7 JP39.8 JP40.1 JP40.2 JP40.3 JP40.4 JP40.5 JP40.6 JP40.7 JP40.8 JP44.4 Q4.2 R38.1 R39.1 R40.1 S4.1 U10.3 U10.5 U10.21 U11.5 U12.2
GND4: C29.1 C30.1 C32.1 C33.2 C34.C C35.C D9.C JP45.2 JP46.9 JP48.5 JP48.6 JP50.1 JP50.2 JP50.3 JP50.4 JP50.5 JP50.6 JP50.7 JP50.8 JP51.1 JP51.2 JP51.3 JP51.4 JP51.5 JP51.6 JP51.7 JP51.8 JP55.4 Q5.2 R49.1 R50.1 R51.1 S5.1 U13.3 U13.5 U13.21 U14.5 U15.2
GND5: C36.1 C37.1 C39.1 C40.2 C41.C C42.C D11.C JP56.2 JP57.9 JP59.5 JP59.6 JP61.1 JP61.2 JP61.3 JP61.4 JP61.5 JP61.6 JP61.7 JP61.8 JP62.1 JP62.2 JP62.3 JP62.4 JP62.5 JP62.6 JP62.7 JP62.8 JP66.4 Q6.2 R60.1 R61.1 R62.1 S6.1 U16.3 U16.5 U16.21 U17.5 U18.2
MISO: JP6.10 U1.16
MISO1: JP12.10 U4.16
MISO2: JP23.10 U7.16
MISO3: JP34.10 U10.16
MISO4: JP45.10 U13.16
MISO5: JP56.10 U16.16
MOSI: JP6.11 U1.15
MOSI1: JP12.11 U4.15
MOSI2: JP23.11 U7.15
MOSI3: JP34.11 U10.15
MOSI4: JP45.11 U13.15
MOSI5: JP56.11 U16.15
N$1: Q1.3 U1.8
N$2: JP9.5 JP9.6 JP9.7 JP9.8 SJ1.2
N$3: JP9.1 JP9.2 JP9.3 JP9.4 SJ3.2
N$4: Q1.1 U1.7
N$5: JP8.5 JP8.6 JP8.7 JP8.8 SJ2.2
N$6: JP8.1 JP8.2 JP8.3 JP8.4 SJ4.2
N$7: D3.A R6.2
N$8: D4.C R7.2
N$9: R10.1 U3.3
N$10: R11.1 U3.4
N$11: R8.1 U3.1
N$12: R4.2 U3.6
N$13: R9.1 U3.2
N$15: D1.A R13.2
N$16: Q2.3 U4.8
N$17: F1.2 JP11.1
N$18: Q2.1 U4.7
N$19: JP19.5 JP19.6 JP19.7 JP19.8 SJ6.2
N$20: JP20.5 JP20.6 JP20.7 JP20.8 SJ9.2
N$21: JP20.1 JP20.2 JP20.3 JP20.4 SJ10.2
N$22: JP19.1 JP19.2 JP19.3 JP19.4 SJ7.2
N$23: D2.C R16.2
N$24: R17.2 U5.6
N$25: R19.1 U5.1
N$26: R20.1 U5.2
N$27: R21.1 U5.3
N$28: R22.1 U5.4
N$29: F2.2 JP22.1
N$30: D5.A R24.2
N$31: Q3.3 U7.8
N$32: Q3.1 U7.7
N$33: JP30.5 JP30.6 JP30.7 JP30.8 SJ11.2
N$34: JP31.5 JP31.6 JP31.7 JP31.8 SJ14.2
N$35: JP31.1 JP31.2 JP31.3 JP31.4 SJ15.2
N$36: JP30.1 JP30.2 JP30.3 JP30.4 SJ12.2
N$37: D6.C R27.2
N$38: R28.2 U8.6
N$39: R30.1 U8.1
N$40: R31.1 U8.2
N$41: R32.1 U8.3
N$42: R33.1 U8.4
N$43: F3.2 JP33.1
N$44: D7.A R35.2
N$45: Q4.3 U10.8
N$46: Q4.1 U10.7
N$47: JP41.5 JP41.6 JP41.7 JP41.8 SJ16.2
N$48: JP42.5 JP42.6 JP42.7 JP42.8 SJ19.2
N$49: JP42.1 JP42.2 JP42.3 JP42.4 SJ20.2
N$50: JP41.1 JP41.2 JP41.3 JP41.4 SJ17.2
N$51: D8.C R38.2
N$52: R39.2 U11.6
N$53: R41.1 U11.1
N$54: R42.1 U11.2
N$55: R43.1 U11.3
N$56: R44.1 U11.4
N$57: F4.2 JP44.1
N$58: D9.A R46.2
N$59: Q5.3 U13.8
N$60: Q5.1 U13.7
N$61: JP52.5 JP52.6 JP52.7 JP52.8 SJ21.2
N$62: JP53.5 JP53.6 JP53.7 JP53.8 SJ24.2
N$63: JP53.1 JP53.2 JP53.3 JP53.4 SJ25.2
N$64: JP52.1 JP52.2 JP52.3 JP52.4 SJ22.2
N$65: D10.C R49.2
N$66: R50.2 U14.6
N$67: R52.1 U14.1
N$68: R53.1 U14.2
N$69: R54.1 U14.3
N$70: R55.1 U14.4
N$71: F5.2 JP55.1
N$72: D11.A R57.2
N$73: Q6.3 U16.8
N$74: Q6.1 U16.7
N$75: JP63.5 JP63.6 JP63.7 JP63.8 SJ26.2
N$76: JP64.5 JP64.6 JP64.7 JP64.8 SJ29.2
N$77: JP64.1 JP64.2 JP64.3 JP64.4 SJ30.2
N$78: JP63.1 JP63.2 JP63.3 JP63.4 SJ27.2
N$79: D12.C R60.2
N$80: R61.2 U17.6
N$81: R63.1 U17.1
N$82: R64.1 U17.2
N$83: R65.1 U17.3
N$84: R66.1 U17.4
N$85: F6.2 JP66.1
RESET: C2.1 JP6.3 JP7.10 R2.1 S1.3 U1.29
RESET1: C7.1 JP12.3 JP13.10 R12.1 S2.3 U4.29
RESET2: C16.1 JP23.3 JP24.10 R23.1 S3.3 U7.29
RESET3: C24.1 JP34.3 JP35.10 R34.1 S4.3 U10.29
RESET4: C31.1 JP45.3 JP46.10 R45.1 S5.3 U13.29
RESET5: C38.1 JP56.3 JP57.10 R56.1 S6.3 U16.29
RXI: JP7.11 U1.30 U3.8
RXI1: JP13.11 U4.30 U5.8
RXI2: JP24.11 U7.30 U8.8
RXI3: JP35.11 U10.30 U11.8
RXI4: JP46.11 U13.30 U14.8
RXI5: JP57.11 U16.30 U17.8
RXI_MIP: JP11.2 R10.2
RXI_MIP1: JP22.2 R21.2
RXI_MIP2: JP33.2 R32.2
RXI_MIP3: JP44.2 R43.2
RXI_MIP4: JP55.2 R54.2
RXI_MIP5: JP66.2 R65.2
RXI_PROG: JP1.3 R8.2
RXI_PROG1: JP15.3 R19.2
RXI_PROG2: JP26.3 R30.2
RXI_PROG3: JP37.3 R41.2
RXI_PROG4: JP48.3 R52.2
RXI_PROG5: JP59.3 R63.2
SCK: JP6.9 R6.1 U1.17
SCK1: JP12.9 R13.1 U4.17
SCK2: JP23.9 R24.1 U7.17
SCK3: JP34.9 R35.1 U10.17
SCK4: JP45.9 R46.1 U13.17
SCK5: JP56.9 R57.1 U16.17
SELECT: D4.A JP10.1 R5.2 SJ5.1 U3.9
SELECT1: D2.A JP21.1 R18.2 SJ8.1 U5.9
SELECT2: D6.A JP32.1 R29.2 SJ13.1 U8.9
SELECT3: D8.A JP43.1 R40.2 SJ18.1 U11.9
SELECT4: D10.A JP54.1 R51.2 SJ23.1 U14.9
SELECT5: D12.A JP65.1 R62.2 SJ28.1 U17.9
TXO: JP7.12 U1.31 U3.7
TXO1: JP13.12 U4.31 U5.7
TXO2: JP24.12 U7.31 U8.7
TXO3: JP35.12 U10.31 U11.7
TXO4: JP46.12 U13.31 U14.7
TXO5: JP57.12 U16.31 U17.7
TXO_MIP: JP11.3 R11.2
TXO_MIP1: JP22.3 R22.2
TXO_MIP2: JP33.3 R33.2
TXO_MIP3: JP44.3 R44.2
TXO_MIP4: JP55.3 R55.2
TXO_MIP5: JP66.3 R66.2
TXO_PROG: JP1.2 R9.2
TXO_PROG1: JP15.2 R20.2
TXO_PROG2: JP26.2 R31.2
TXO_PROG3: JP37.2 R42.2
TXO_PROG4: JP48.2 R53.2
TXO_PROG5: JP59.2 R64.2
VCC: C3.2 C4.2 C10.1 C13.A JP1.4 JP6.4 R1.2 R2.2 R3.2 SJ1.3 SJ2.3 SJ3.3 SJ4.3 U1.4 U1.6 U1.18 U2.5 U3.10
VCC1: C5.2 C8.2 C9.1 C11.A JP12.4 JP15.4 R12.2 R14.2 R15.2 SJ6.3 SJ7.3 SJ9.3 SJ10.3 U4.4 U4.6 U4.18 U5.10 U6.5
VCC2: C14.2 C17.2 C18.1 C20.A JP23.4 JP26.4 R23.2 R25.2 R26.2 SJ11.3 SJ12.3 SJ14.3 SJ15.3 U7.4 U7.6 U7.18 U8.10 U9.5
VCC3: C22.2 C25.2 C26.1 C27.A JP34.4 JP37.4 R34.2 R36.2 R37.2 SJ16.3 SJ17.3 SJ19.3 SJ20.3 U10.4 U10.6 U10.18 U11.10 U12.5
VCC4: C29.2 C32.2 C33.1 C34.A JP45.4 JP48.4 R45.2 R47.2 R48.2 SJ21.3 SJ22.3 SJ24.3 SJ25.3 U13.4 U13.6 U13.18 U14.10 U15.5
VCC5: C36.2 C39.2 C40.1 C41.A JP56.4 JP59.4 R56.2 R58.2 R59.2 SJ26.3 SJ27.3 SJ29.3 SJ30.3 U16.4 U16.6 U16.18 U17.10 U18.5
VIN: C19.A F1.1 JP6.1 SJ1.1 SJ2.1 SJ3.1 SJ4.1 U2.1 U2.3
VIN1: C12.A F2.1 JP12.1 SJ6.1 SJ7.1 SJ9.1 SJ10.1 U6.1 U6.3
VIN2: C21.A F3.1 JP23.1 SJ11.1 SJ12.1 SJ14.1 SJ15.1 U9.1 U9.3
VIN3: C28.A F4.1 JP34.1 SJ16.1 SJ17.1 SJ19.1 SJ20.1 U12.1 U12.3
VIN4: C35.A F5.1 JP45.1 SJ21.1 SJ22.1 SJ24.1 SJ25.1 U15.1 U15.3
VIN5: C42.A F6.1 JP56.1 SJ26.1 SJ27.1 SJ29.1 SJ30.1 U18.1 U18.3